# EAGLE board avr_programming_shield_Sockets (EAGLE 6.3)
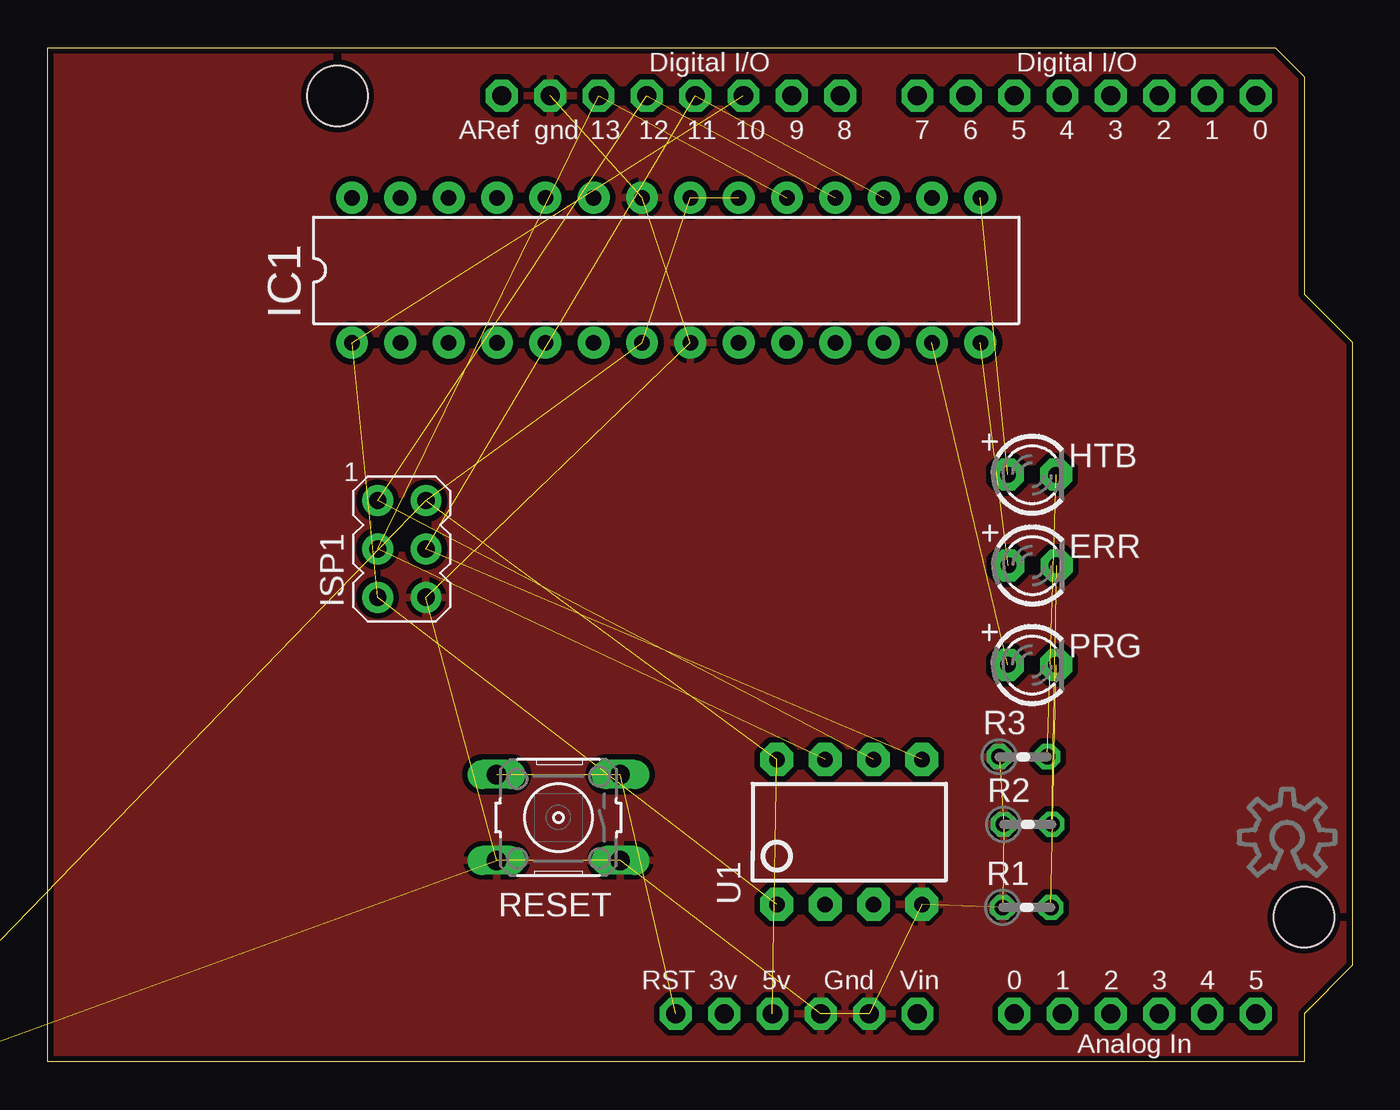
[diagram p0: board, top side]
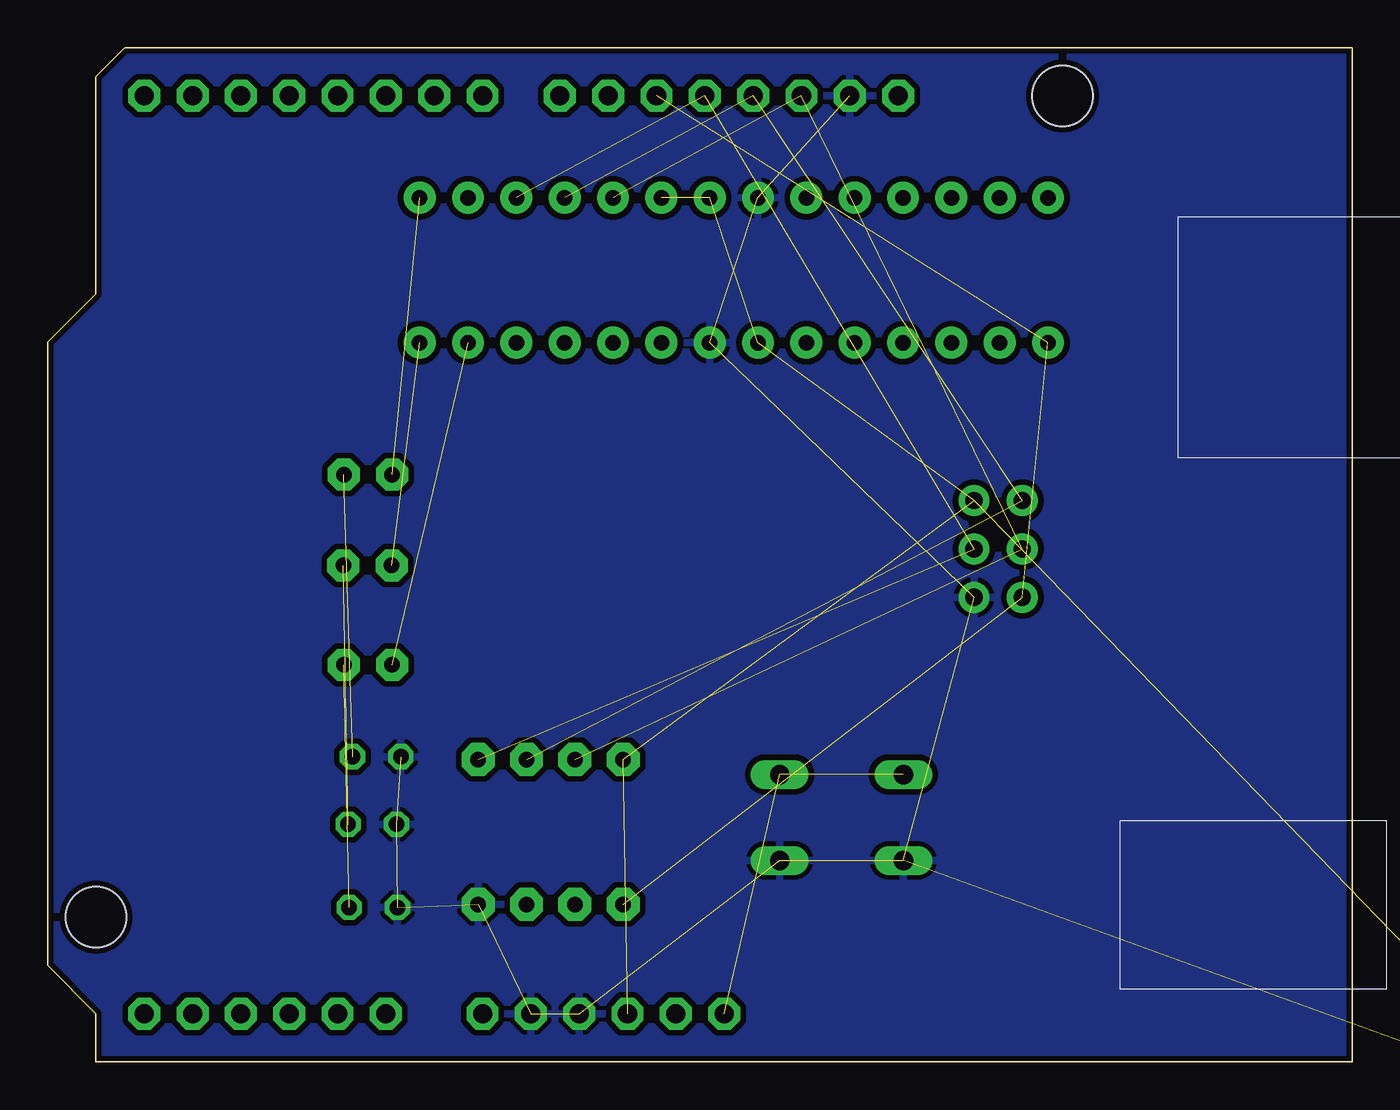
[diagram p1: board, bottom side, seen from below]

Size 68.58 x 53.34 mm. Coordinates in mm from the lower left corner, seen from the top.
Outline: 0,53.34 64.52,53.34 66.04,51.82 66.04,40.39 68.58,37.85 68.58,5.08 66.04,2.54 66.04,0 0,0 0,53.34
Copper layers (1*16): Top 0.035mm / dielectric 1.5mm / Bottom 0.035mm
Design rules "default *": minimum track width 12mil, minimum drill 19mil, track to track 12mil, track to pad 12mil, pad to pad 12mil, via to via 12mil, smd to smd 0mil, copper to edge 12mil, drill to drill 8mil, minimum pad ring 10mil, minimum via ring 8mil, stop-mask expansion 4mil, vias tented up to drill 20mil, thermal gap 10mil
Net classes: 1 power: width 0.61 mm
Holes 3.2 mm at 66.04,7.62 15.24,50.8

## Footprints (pad centres in the part's own frame; a part is rotated, then mirrored left to right if it is on the bottom)
LED3MM = drill 0.813 pad 1.676 octagon: A -1.27,0; K 1.27,0
DIL28-3-ROUND = drill 0.813 pad 1.676: 1 -16.51,-3.81; 2 -13.97,-3.81; 3 -11.43,-3.81; 4 -8.89,-3.81; 5 -6.35,-3.81; 6 -3.81,-3.81; 7 -1.27,-3.81; 8 1.27,-3.81; 9 3.81,-3.81; 10 6.35,-3.81; 11 8.89,-3.81; 12 11.43,-3.81; 13 13.97,-3.81; 14 16.51,-3.81; 15 16.51,3.81; 16 13.97,3.81; 17 11.43,3.81; 18 8.89,3.81; 19 6.35,3.81; 20 3.81,3.81; 21 1.27,3.81; 22 -1.27,3.81; 23 -3.81,3.81; 24 -6.35,3.81; 25 -8.89,3.81; 26 -11.43,3.81; 27 -13.97,3.81; 28 -16.51,3.81
DIL14 = drill 0.813 long: 1 -7.62,-3.81; 2 -5.08,-3.81; 3 -2.54,-3.81; 4 0,-3.81; 5 2.54,-3.81; 6 5.08,-3.81; 7 7.62,-3.81; 8 7.62,3.81; 9 5.08,3.81; 10 2.54,3.81; 11 0,3.81; 12 -2.54,3.81; 13 -5.08,3.81; 14 -7.62,3.81
AVRISP = drill 0.9 pad 1.626: 1 -1.27,2.54; 2 1.27,2.54; 3 -1.27,0; 4 1.27,0; 5 -1.27,-2.54; 6 1.27,-2.54
0204V = drill 0.813 octagon: 1 -1.27,0; 2 1.27,0
B3F-10XX = drill 1.016 long: 1 -3.251,2.261; 2 3.251,2.261; 3 -3.251,-2.261; 4 3.251,-2.261
DIP08 = drill 0.813 pad 1.727 octagon: 1 -3.81,-3.81; 2 -1.27,-3.81; 3 1.27,-3.81; 4 3.81,-3.81; 5 3.81,3.81; 6 1.27,3.81; 7 -1.27,3.81; 8 -3.81,3.81
ARDUINO-NOHOLE = drill 1 pad 1.676 octagon: 3V 35.56,2.54; 5V 38.1,2.54; A0 50.8,2.54; A1 53.34,2.54; A2 55.88,2.54; A3 58.42,2.54; A4 60.96,2.54; A5 63.5,2.54; AREF 23.876,50.8; D0 63.5,50.8; D1 60.96,50.8; D2 58.42,50.8; D3 55.88,50.8; D4 53.34,50.8; D5 50.8,50.8; D6 48.26,50.8; D7 45.72,50.8; D8 41.656,50.8; D9 39.116,50.8; D10 36.576,50.8; D11 34.036,50.8; D12 31.496,50.8; D13 28.956,50.8; GND 26.416,50.8; GND1 43.18,2.54; GND2 40.64,2.54; RESET 33.02,2.54; VIN 45.72,2.54

## Placement (x,y rotation side)
E$1  [OSHWLOGO_TOL_0.2]  65.15,11.81 0 top
ERR  [LED3MM]  51.77,26.11 0 top
HTB  [LED3MM]  51.74,30.89 0 top
IC1  ATMEGA168PROUND  [DIL28-3-ROUND]  32.51,41.63 0 top
IC2  TINY24/44/84-PU  [DIL14]  -14.15,-9.7 0 top  (outside the outline)
ISP1  AVRISP-6  [AVRISP]  18.62,26.97 0 top
PRG  [LED3MM]  51.74,20.88 0 top
R1  [0204V]  51.46,8.13 0 top
R2  [0204V]  51.51,12.5 0 top
R3  [0204V]  51.28,16.05 0 top
RESET  [B3F-10XX]  26.85,12.85 180 top
U1  TINY85-20-DIP  [DIP08]  42.14,12.09 0 top
U$1  ARDUINO-NOHOLE  [ARDUINO-NOHOLE]  0,0 0 top

## Library data of the parts
E$1 ERR HTB IC1 ISP1 PRG R1-R3 U$1 = adafruit
IC2 = avr-7
RESET = switch-omron
U1 = SparkFun-DigitalIC; PROD_ID: IC-09445

## Nets
GND [power]: IC1.8 IC1.22 IC2.14 ISP1.6 R1.1 R2.1 R3.1 RESET.1 RESET.2 U1.4 U$1.GND U$1.GND1 U$1.GND2
N$2: IC1.19 ISP1.3 U1.7 U$1.D13
N$3: IC1.18 ISP1.1 U1.6 U$1.D12
N$5: IC1.1 ISP1.5 U1.1 U$1.D10
N$6: IC1.17 ISP1.4 U1.5 U$1.D11
N$8: PRG.K R1.2
N$9: ERR.K R2.2
N$10: HTB.K R3.2
N$12: IC1.13 PRG.A
N$13: ERR.A IC1.14
N$14: HTB.A IC1.15
N$17: U$1.3V
RESET: RESET.3 RESET.4 U$1.RESET
VCC: IC1.7 IC1.20 IC1.21 IC2.1 ISP1.2 U1.8 U$1.5V
VIN: U$1.VIN

## Tracks (layer width: path | path; a pad name or v marks a point on that pad's centre or on a via)
GND  (12 unrouted)
  pour Bottom: 0,53.34 69.22,53.98 69.22,-0.51 0,0
  pour Top: 0,53.34 68.96,53.09 68.71,0.25 0,0.25
N$2  (3 unrouted)
N$3  (3 unrouted)
N$5  (3 unrouted)
N$6  (3 unrouted)
N$8  (1 unrouted)
N$9  (1 unrouted)
N$10  (1 unrouted)
N$12  (1 unrouted)
N$13  (1 unrouted)
N$14  (1 unrouted)
RESET  (2 unrouted)
VCC  (6 unrouted)